# Altium PCB TOF.PcbDoc
Units mil, origin at the board's own origin, x right, y up, seen from the top; angles counter-clockwise.
Board outline 2202.74 x 1415.43 mil, 2 copper layers (Top Layer, Bottom Layer); 40 components, 38 nets, 164 pads, 49 vias.
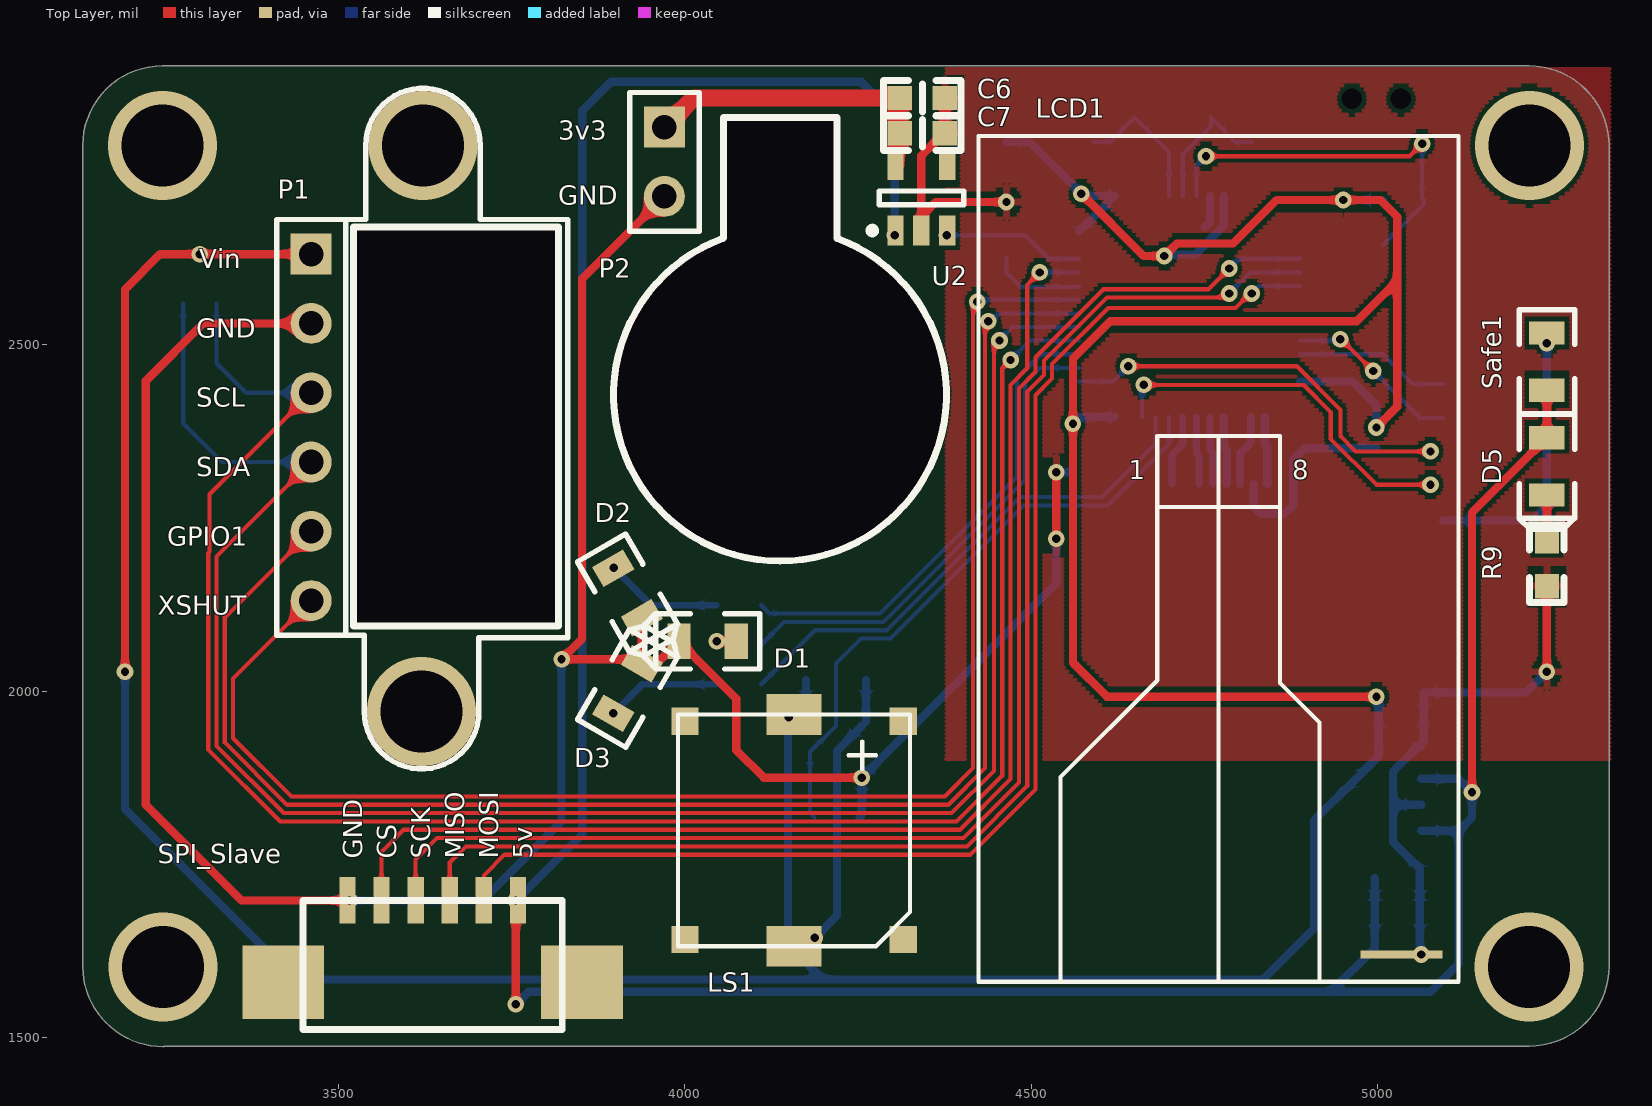
[diagram p0: Top Layer view]
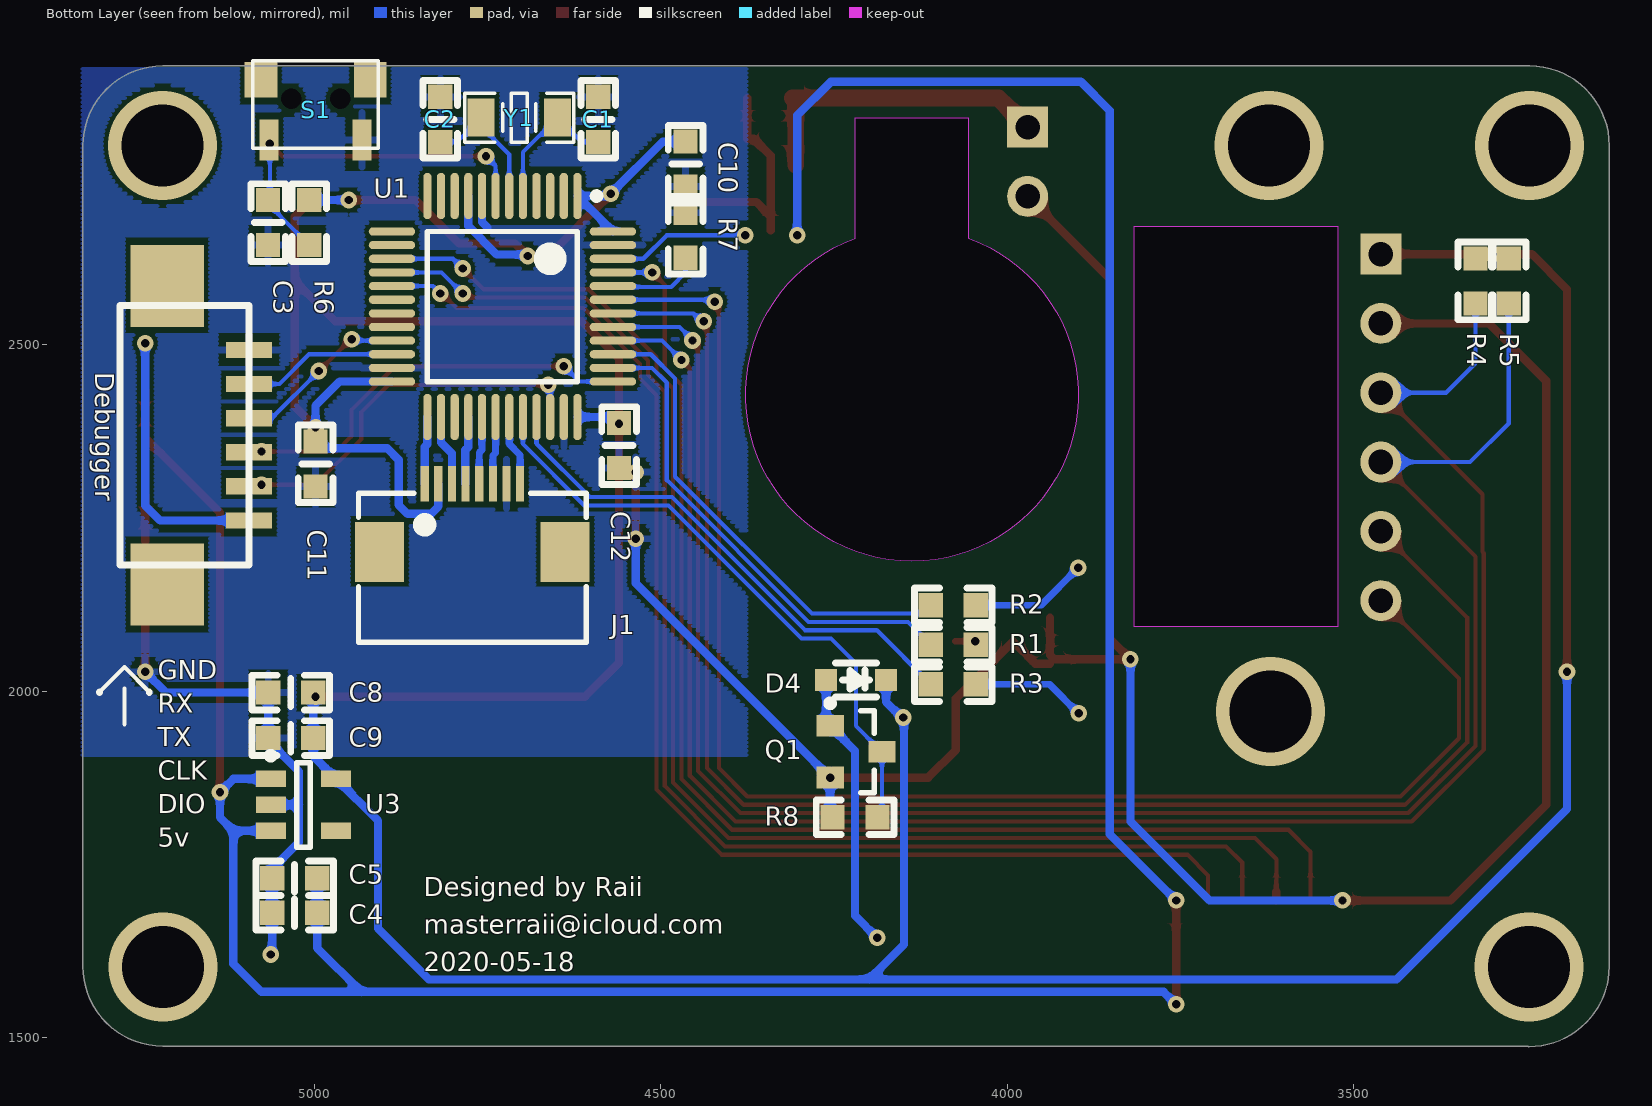
[diagram p1: Bottom Layer view, seen from below]
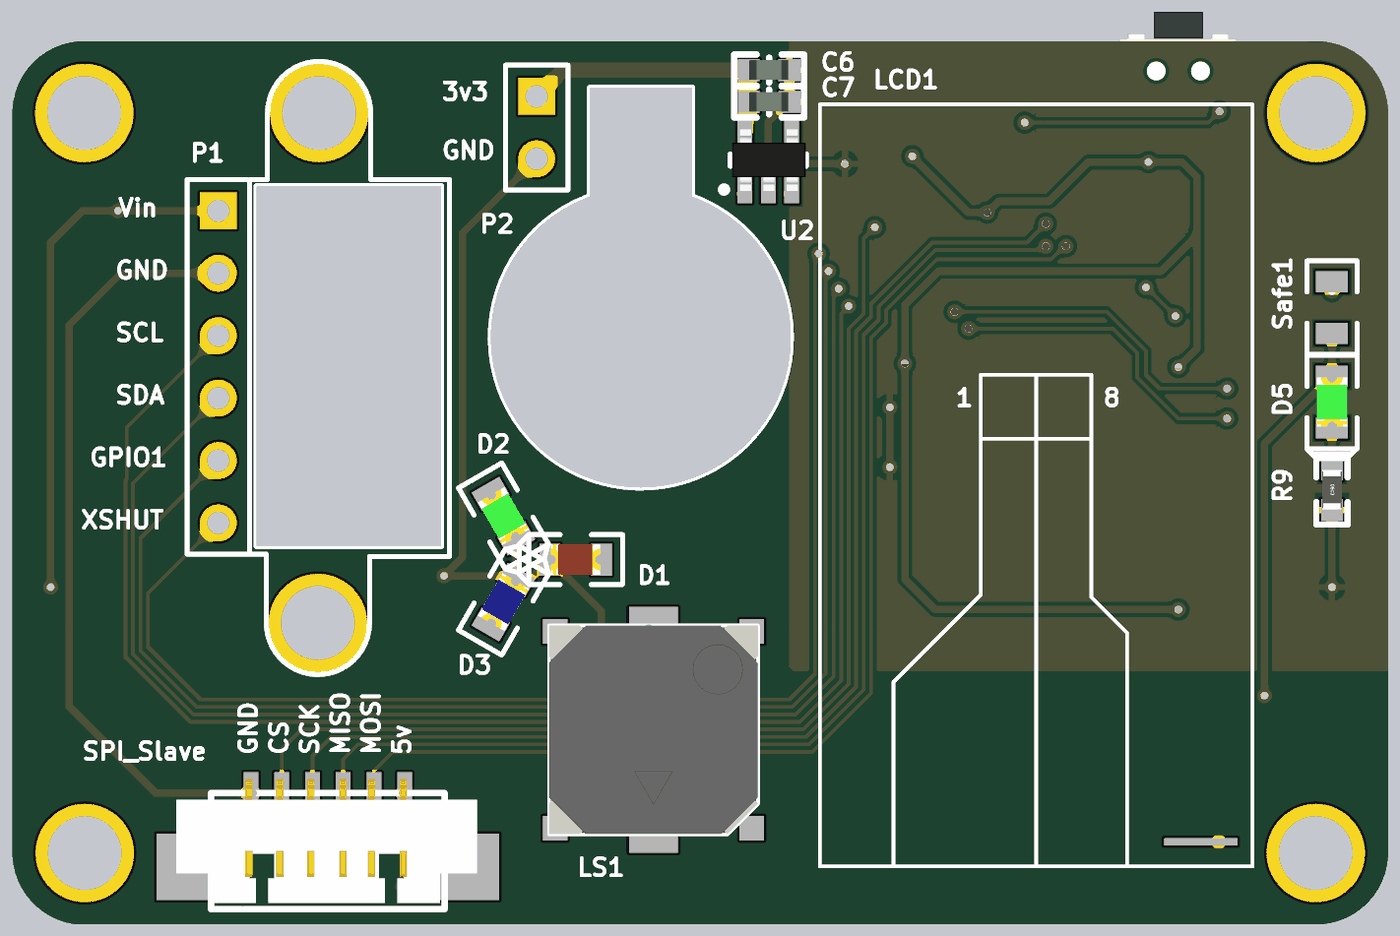
[diagram p2: 3D render of the assembled board from above, using the file's embedded part models]
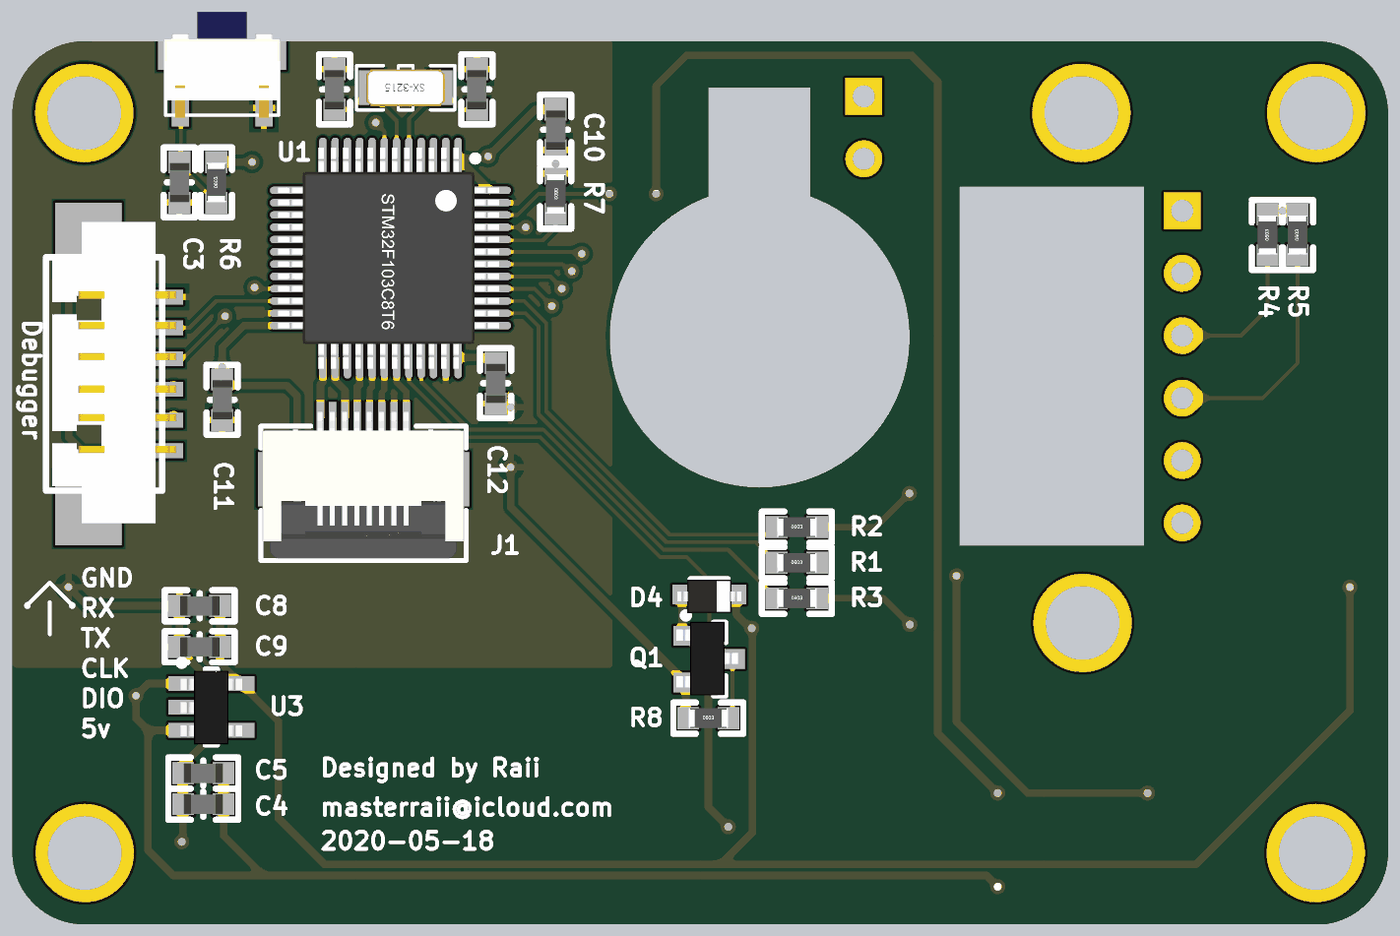
[diagram p3: 3D render of the assembled board from below, using the file's embedded part models]

## Layer stack, top to bottom
Top Solder: solder mask 0.4, Solder Resist, Dk 3.5
Top Layer: signal copper 1.4
Dielectric 1: dielectric 12.6, FR-4, Dk 4.8
Bottom Layer: signal copper 1.4
Bottom Solder: solder mask 0.4, Solder Resist, Dk 3.5

## Board outline
3130.99,1602.71 3130.99,2787.4 cw(c3246,2787.4) 3245.95,2902.42 cw(c3246,2897.4) 3246,2902.42 5218.71,2902.42 cw(c5218.71,2787.4) 5333.72,2787.4 5333.72,1602.71 cw(c5218.71,1602.71) 5218.71,1487.69 3249.28,1487.69 cw(c3246.71,1492) 3246.71,1486.98 cw(c3246.71,1602) 3165.03,1521.03 cw(c3246,1602.71)
cut-out: 4055.11,2653.47 ccw(c4137.24,2427.8) 4219.38,2653.47 4219.38,2827.8 4055.95,2827.8 4055.95,2654.32
cut-out: 3522,2094 3522,2670 3817.41,2670 3817.41,2094

## Design rules (kind name [scope] priority, off if disabled: settings)
Clearance [All] p1: gap=6 ignorepadtopadclearanceinfootprint=TRUE
PolygonConnect [All] p1: connectstyle=Relief reliefconductorwidth=10 reliefentries=4 polygonreliefangle="90 Angle" airgapwidth=10
RoutingVias [All] p1: holewidth=80 width=80 viastyle="Through Hole" minholewidth=12 minwidth=24 maxholewidth=12 maxwidth=24
SolderMaskExpansion [All] p1: expansion=4
Width [All] p1: maxlimit=60 minlimit=6 preferedwidth=6
30 further rules are at their usual default settings.

## Components (designator, comment, footprint, x,y, rotation, side; value= is the part's Value field where it differs from the comment)
C1 "Cap" 0603C 4590,2825.23 r270 bottom value=20pF
C2 "Cap" 0603C 4818,2825.23 r270 bottom value=20pF
C3 "Cap" 0603C 5066.5,2676.26 r90 bottom value=100nF
C4 "Cap" 0603C 5028.17,1680.28 r180 bottom value=100nF
C5 "Cap" 0603C 5028.17,1730 r180 bottom value=100nF
C6 "Cap" 0603C 4342.67,2856.08 r180 top value=100nF
C7 "Cap" 0603C 4342.67,2805.17 r180 top value=100nF
C8 "Cap" 0603C 5033.83,1998 r180 bottom value=100nF
C9 "Cap" 0603C 5033.83,1932.28 r180 bottom value=100nF
C10 "Cap" 0603C 4464,2760.65 r90 bottom value=100nF
C11 "Cap" 0603C 4998,2328 r90 bottom value=100nF
C12 "Cap" 0603C 4560,2354.5 r90 bottom value=100nF
D1 "LED0" LED-0805-Red 4032.83,2072 r180 top
D2 "LED0" 0805LED 3917.32,2141.8 r300 top
D3 "LED0" LED-0805-Blue 3917.32,2004 r60 top
D4 "Diode" SOD-323- 4218,2016 r0 bottom
D5 "LED0" 0805LED 5244,2324.43 r270 top
Debugger "Header 6" GX1.25_T_6P 5094,2369.39 r90 bottom
J1 "FPC0.5-8P" FPC0.5-8P 4771.65,2200.79 r180 bottom
LCD1 "1.14 ''135x240 LCD" "1.14'' LCD" 4423.76,1580.63 r0 top
LS1 "Speaker" MLT-8530 4157.48,1799.21 r90 top
P1 "Header 6" HDR1X6 3460.63,2630.71 r270 top
P2 "Header 2" HDR1X2 3970.41,2814 r270 top
Q1 "AO3400" SOT-23 4218,1912.6 r180 bottom
R1 "10K" 0603R 4077.67,2067 r180 bottom
R2 "10K" 0603R 4077.67,2124 r180 bottom
R3 "10K" 0603R 4077.67,2010 r180 bottom
R4 "10K" 0603R 3324,2592 r90 bottom
R5 "10K" 0603R 3276,2592 r90 bottom
R6 "10K" 0603R 5007.26,2676.26 r90 bottom
R7 "Res2" 0603R 4464,2658 r270 bottom value=10K
R8 "Res2" 0603R 4219.38,1818 r180 bottom value=1K
R9 "10K" 0603R 5244,2184 r270 top
S1 "SW-PB" Key-2*4*3.5-S 4998,2898 r180 bottom
Safe1 "Res2" 0805R 5244,2475.7 r90 top value=1A
SPI_Slave "Header 6" GX1.25_T_6P 3636,1698 r180 top
U1 "STM32F100C8T6B" LQFP-48 4728.35,2555.12 r270 bottom
U2 "RT9013-3.3" SOT-23-5 4341.31,2712 r90 top
U3 "RT9013-3.3" SOT-23-5 5015.43,1836 r180 bottom
Y1 "8Mhz" Cry-3215 4704,2827.8 r0 bottom

## Footprints (in the part's own frame and the unit in brackets; to place one, negate y for a bottom-side part, rotate by r counter-clockwise, add the part's x,y. Pads: shape width x height; smd on the part's side, far side on the other; paste and mask are expansions set on the pad)
"1.14'' LCD" [mm]
  rect 3x0.3 smd: 1(15.5,1)
  silkscreen extent 0,0 17.6,31
0603C [mil]
  rect 35x35 smd: 1(-32.5,0) 2(32.5,0)
  silkscreen extent -56,-25 56,25, body extent -31,-16 31,15, height 18
0603R [mil]
  rect 35x35 smd: 1(-32.5,0) 2(32.5,0)
  silkscreen extent -56,-25 56,25, body extent -31,-16 31,16, height 16
0805LED [mm] "Chip Resistor, 2-Leads, Body 2.00x1.25mm, IPC Medium Density"
  rect 0.85x1.3 smd: 1(-1.05,0) 2(1.05,0)
  silkscreen extent -1.91,-1.02 2.3,1.02, body extent -1,-0.62 1,0.63, height 1.1
0805R [mm] "Chip Resistor, 2-Leads, Body 2.00x1.25mm, IPC Medium Density"
  rect 0.85x1.3 smd: 1(-1.05,0) 2(1.05,0)
  silkscreen extent -1.91,-1.02 1.91,1.02, body extent -1,-0.63 1,0.63, height 0.5
Cry-3215 [mm]
  rect 1x1.4 smd: 1(1.4,0) 2(-1.4,0)
  silkscreen extent -2,-0.9 2,0.9, body extent -1.6,-0.75 1.6,0.75, height 0.81
FPC0.5-8P [mm]
  rect 1.8x2.2 smd: 0(-3.4,0) 0(3.4,0)
  rect 0.3x1.3 smd: 1(1.75,2.497) 2(1.25,2.497) 3(0.75,2.497) 4(0.25,2.497) 5(-0.25,2.497) 6(-0.75,2.497) 7(-1.25,2.497) 8(-1.75,2.497)
  silkscreen extent -4.17,-3.3 4.17,2.16, body extent -4.11,-3.23 4.09,2.77, height 2
GX1.25_T_6P [mm]
  rect 3x2.7 smd: 0(-5.475,3) 0(5.475,3)
  rect 0.6x1.7 smd: 1(-3.125,0) 2(-1.875,0) 3(-0.625,0) 4(0.625,0) 5(1.875,0) 6(3.125,0)
  silkscreen extent -4.75,0 4.75,4.72, body extent -6.07,-0.58 6.18,4.47, height 3.71
HDR1X2 [mm] "Connector; Header; 2 Position"
  rect 1.5x1.5 hole 0.9: 1(0,0)
  round 1.5 hole 0.9: 2(2.54,0)
  silkscreen extent -1.27,-1.27 3.81,1.27
HDR1X6 [mm] "Connector; Header; 6 Position"
  rect 1.5x1.5 hole 0.9: 1(0,0)
  round 1.5 hole 0.9: 2(2.54,0) 3(5.08,0) 4(7.62,0) 5(10.16,0) 6(12.7,0)
  silkscreen extent -1.27,-1.27 13.97,1.27
Key-2*4*3.5-S [mm]
  rect 1.2x1.3 smd: 0(-2,-0.4) 0(2,-0.4)
  rect 0x0 hole 0.75: 0(-0.9,-1.1) 0(0.9,-1.1)
  rect 0.7x1.5 smd: 1(-1.7,-2.6) 2(1.7,-2.6)
  silkscreen extent -2.3,-2.9 2.3,0.3, body extent -2.35,-3 2.35,1.3, height 2.8
LED-0805-Blue [mm] "Chip Resistor, 2-Leads, Body 2.00x1.25mm, IPC Medium Density"
  rect 0.85x1.3 smd: 1(-1.05,0) 2(1.05,0)
  silkscreen extent -1.91,-1.02 2.3,1.02, body extent -1,-0.62 1,0.63, height 1.1
LED-0805-Red [mm] "Chip Resistor, 2-Leads, Body 2.00x1.25mm, IPC Medium Density"
  rect 0.85x1.3 smd: 1(-1.05,0) 2(1.05,0)
  silkscreen extent -1.9,-1.02 2.3,1.02, body extent -1,-0.62 1,0.63, height 1.1
LQFP-48 [mm]
  oval 1.7x0.3 smd: 1(-4.05,2.75) 2(-4.05,2.25) 3(-4.05,1.75) 4(-4.05,1.25) 5(-4.05,0.75) 6(-4.05,0.25) 7(-4.05,-0.25) 8(-4.05,-0.75) 9(-4.05,-1.25) 10(-4.05,-1.75) 11(-4.05,-2.25) 12(-4.05,-2.75) 25(4.05,-2.75) 26(4.05,-2.25) 27(4.05,-1.75) 28(4.05,-1.25) 29(4.05,-0.75) 30(4.05,-0.25) 31(4.05,0.25) 32(4.05,0.75) 33(4.05,1.25) 34(4.05,1.75) 35(4.05,2.25) 36(4.05,2.75)
  oval 0.3x1.7 smd: 13(-2.75,-4.05) 14(-2.25,-4.05) 15(-1.75,-4.05) 16(-1.25,-4.05) 17(-0.75,-4.05) 18(-0.25,-4.05) 19(0.25,-4.05) 20(0.75,-4.05) 21(1.25,-4.05) 22(1.75,-4.05) 23(2.25,-4.05) 24(2.75,-4.05) 37(2.75,4.05) 38(2.25,4.05) 39(1.75,4.05) 40(1.25,4.05) 41(0.75,4.05) 42(0.25,4.05) 43(-0.25,4.05) 44(-0.75,4.05) 45(-1.25,4.05) 46(-1.75,4.05) 47(-2.25,4.05) 48(-2.75,4.05)
  silkscreen extent -4.17,-2.75 2.75,3.57, body extent -4.5,-4.58 4.5,4.42, height 1.6
MLT-8530 [mm]
  rect 1x1 smd: 0(-4,-4) 0(-4,4) 0(4,-4) 0(4,4)
  rect 1.5x2 smd: 1(4.25,0) 2(-4.25,0)
  silkscreen extent -4.25,-4.25 4.25,4.25, body extent -4.25,-4.25 4.25,4.25, height 3
SOD-323- [mm] "开关二极管2.60mmx1.20mm"
  rect 0.8x0.8 smd: 1(1.1,0) 2(-1.1,0)
  silkscreen extent -0.75,-0.63 0.75,0.63, body extent -1.3,-0.6 1.3,0.75, height 1.1
SOT-23 [mm] "SOT23, 3-Leads, Body 2.90x2.45mm, Pitch 0.95mm, IPC Medium Density"
  rect 1x0.8 smd: 1(-0.95,0.95) 2(0.95,0) 3(-0.95,-0.95)
  silkscreen extent -1.08,-1.5 0.67,1.9, body extent -1.33,-1.47 1.17,1.53, height 1.05
SOT-23-5 [mm] "SOT23, 5-Leads, Body 2.90x2.80mm, Pitch 0.95mm, IPC Medium Density"
  rect 1.1x0.6 smd: 1(-1.2,0.95) 2(-1.2,0) 3(-1.2,-0.95) 4(1.2,-0.95) 5(1.2,0.95)
  silkscreen extent -1.32,-1.55 0.25,1.92, body extent -1.25,-1.53 1.25,1.47, height 1.05

## Part data
C1 C2 C3 C4 C5 C6 C7 C8 C9 C10 C11 C12: "Capacitor", LatestRevisionDate=17-Jul-2002, LatestRevisionNote="Re-released for DXP Platform.", PackageDescription="Radial Cap, Thru-Hole; 2 Leads; 0.3 in Pin Spacing", PackageReference=RAD-0.3, Published=8-Jun-2000, Publisher="Altium Limited"
D1 D2 D3 D5: "Typical INFRARED GaAs LED", LatestRevisionDate=08-Jul-2005, LatestRevisionNote="Mech Layer 1 removed.", PackageDescription="LED; 2 Leads", PackageReference=LED-0, Published=8-Jun-2000, Publisher="Altium Limited"
D4: "Default Diode", Code_JEDEC=DO-214-AB, LatestRevisionDate=17-Jul-2002, LatestRevisionNote="Re-released for DXP Platform.", PackageDescription="DO-214-AB/SMC; 2 C-Bend Leads; Body 7.9 x 5.9 mm, inc. leads (LxW)", PackageReference=SMC, PackageVersion=Sep-1996, Published=8-Jun-2000, Publisher="Altium Limited"
Debugger P1 SPI_Slave: "Header, 6-Pin", LatestRevisionDate=17-Jul-2002, LatestRevisionNote="Re-released for DXP Platform.", Publisher="Altium Limited"
J1: "贴片"
LS1: "Loudspeaker", LatestRevisionDate=17-Jul-2002, LatestRevisionNote="Re-released for DXP Platform.", PackageReference=PIN2, Published=24-Mar-1999, Publisher="Altium Limited"
P2: "Header, 2-Pin", LatestRevisionDate=17-Jul-2002, LatestRevisionNote="Re-released for DXP Platform.", Publisher="Altium Limited"
Q1: library part MOSFET-N, "N-Channel MOSFET", LatestRevisionDate=17-Jul-2002, LatestRevisionNote="Re-released for DXP Platform.", PackageDescription="TO, Flat Index; 3 In-Line, Axial Leads; Body Dia. 4.6mm; Lead Dia. 0.5 mm (max)", PackageReference=E3, PackageVersion=1995/1996, Published=8-Jun-2000, Publisher="Altium Limited"
R1 R2 R3 R4 R5 R6 R9: library part Res2, "Resistor", LatestRevisionDate=17-Jul-2002, LatestRevisionNote="Re-released for DXP Platform.", PackageDescription="Axial Device, Thru-Hole; 2 Leads; 0.4 in Pin Spacing", PackageReference=AXIAL-0.4, Published=8-Jun-2000, Publisher="Altium Limited"
R7 R8 Safe1: "Resistor", LatestRevisionDate=17-Jul-2002, LatestRevisionNote="Re-released for DXP Platform.", PackageDescription="Axial Device, Thru-Hole; 2 Leads; 0.4 in Pin Spacing", PackageReference=AXIAL-0.4, Published=8-Jun-2000, Publisher="Altium Limited"
S1: "Switch", LatestRevisionDate=17-Jul-2002, LatestRevisionNote="Re-released for DXP Platform.", PackageDescription="Switch; 2 Leads", PackageReference=SPST-2, Published=24-Mar-1999, Publisher="Altium Limited"
U1: "ARM Cortex-M3 32-bit MCU, 64 KB Flash, 8 KB Internal RAM, 37 I/Os, 48-pin LQFP, -40 to 85 degC, Tray", I/Os (High Current)=37, Operating Frequency(F) (Processor speed) (MHz)=24, Supplier Part Number 1=497-10499-ND, Supply Voltage(Vcc) min (V)=2, A/D Converter="1x12-bit (10 Channel)", ComponentLink1Description="Manufacturer URL", ComponentLink1URL=http://www.st.com/web/en/home.html, ComponentLink2Description=Datasheet, ComponentLink2URL=http://www.st.com/st-web-ui/static/active/en/resource/technical/document/datasheet/CD00251732.pdf, ComponentLink3Description="Package Specification", ComponentLink3URL=http://www.st.com/st-web-ui/static/active/en/resource/technical/document/datasheet/DM00058181.pdf, Core="ARM Cortex-M3", D/A Converter="2x12-bit (2 Channel)", DatasheetVersion="Rev. 7", FLASH Size (Prog) (kB)=64, Internal RAM Size (kB)=8, Mounting Technology="Surface Mount", PackageDescription="48-Pin Low Profile Quad Flat Package, 7 x 7 mm Body, 0.5 mm Pitch", PackageReference=LQFP48, PackageVersion="Rev. 6, 06/2013", Packing=Tray, PartNumber=STM32F100C8T6B, Supplier 1=Digi-Key, Supplier 2=Farnell, Supplier 3=Newark, Supplier 4=Mouser, Supplier Part Number 2=1838511, Supplier Part Number 3=76R0988, Supplier Part Number 4=511-STM32F100C8T6B
U2 U3: library part RT9013, "3.3V 500mA"
Y1: library part XTAL, LatestRevisionDate=17-Jul-2002, LatestRevisionNote="Re-released for DXP Platform.", PackageDescription="Crystal, Thru-Hole; 2 Leads; Body 3.1 x 8.2 mm (Dia.xH)", PackageReference=R38, Published=8-Jun-2000, Publisher="Altium Limited"

## Via types
v1: diameter 24, hole 12, Top Layer to Bottom Layer, tented both sides, 43 vias
v2: diameter 157.48, hole 118.11, Top Layer to Bottom Layer, 6 vias

## Nets (pads, with @x,y where several pads share a name; then routed paths per layer and width w, separated by ;. In a path a pad name is that pad's centre, name@x,y a point inside that pad or via, vN(x,y) a via of type N, cw(c..) or ccw(c..) an arc to the next point about the centre after c; other vN are vias at no path point)
3v3: C8.2 C9.2 C10.2 C11.2 C12.2 D4.2 J1.7 LS1.1 P1.1 R4.2 R5.2 R6.2 U1.1 U1.9 U1.24 U1.36 U1.48 U3.5 | length 6970.9
  Top Layer w12: v1(3192,2028) 3192,2580 3242.71,2630.71 v1(3300,2630.71) P1.1 ; v1(4572,2718) 4662,2628 v1(4692,2628) 4710,2646 4791.29,2646 4854.05,2708.76 v1(4950,2708.76) 5004,2708.76 5028,2684.76 5028,2592 ; v1(4998,1992) 4609.03,1992 4560,2041.03 v1(4560,2386.09) 4560,2480 4614,2534 4970,2534 5028,2592 ; v1(4998,2380.49) 5028,2410.49 5028,2592
  Bottom Layer w12: v1(3192,2028) 3192,1830 3438,1584 4199.27,1584 ; v1(4149.86,1962) 4148.91,1961.05 v1@4148.91,1958.91 ; D4.2 4174.69,1984.69 v1@4148.91,1958.91 ; C10.2 4496.85,2793.15 v1(4572,2718) 4575.43,2714.57 U1.1 U1.48 ; C12.2@4560,2395.67 U1.36 ; v1(4692,2628) 4692,2630.32 4736.59,2630.32 4777.56,2671.28 U1.9 ; J1.7 4820.87,2266.81 4831.68,2256 4865.01,2256 4878,2268.99 4878,2334 4894.49,2350.49 C11.2@4998,2350.49 ; U1.24 4963.15,2446.85 4998,2412 v1(4998,2380.49) ; v1(4950,2708.76) 4950,2706 4952.76,2708.76 R6.2 ; C8.2@5001.33,1992 C9.2 5001.33,1906.55 U3.5 4908,1813.21 4908,1657.46 4834.54,1584 4199.27,1584 ; v1@4148.91,1958.91 4148.91,1634.36 4199.27,1584
5v: C4.2 C5.2 D5.1 Safe1.1 SPI_Slave.1 U2.1 U3.1 U3.3 | length 4583.4
  Top Layer w12: v1(3756,1548) 3756,1694.97 SPI_Slave.1 ; v1(5136,1854) 5136,2257.76 D5.1 Safe1.1
  Bottom Layer w12: v1(3756,1548) 3774,1566 4932,1566 ; v1(3756,1698) 3852,1794 3852,2838 3893.53,2879.53 4254.47,2879.53 4302.97,2831.03 v1(4302.97,2658) ; C5.2 C4.2 4995.67,1629.67 4932,1566 ; U3.3 5116.6,1798.6 ; U3.1 5116.6,1873.4 v1(5136,1854) 5136,1818 5116.6,1798.6 ; 4932,1566 5076,1566 5116.6,1606.6 5116.6,1798.6
GND: C1.1 C2.1 C3.1 C4.1 C5.1 C6.1 C7.1 C8.1 C9.1 C10.1 C11.1 C12.1 D1.2 D2.2 D3.2 Debugger.6 J1.2 LCD1.1 P1.2 P2.2 Q1.3 R7.1 R8.1 R9.2 S1.2 SPI_Slave.6 U1.8 U1.23 U1.35 U1.47 U2.2 U3.2 | length 4978.7
  Top Layer w12: P1.2 3304.71,2530.71 3222,2448 3222,1836 3360,1698 SPI_Slave.6 ; D3.2 3959.29,2039.8 D1.2 4074,1989.49 4074,1915.03 4113.83,1875.2 v1(4255.4,1875.2) ; D2.2 3937.99,2052.2 3931.79,2046 v1(3822,2046) 3851.55,2075.55 3851.55,2595.14 P2.2 ; U2.2 U2.2@4341.31,2685.31 ; C6.1 C7.1 4375.17,2797.17 4365.47,2797.17 4341.31,2773.01 U2.2@4341.31,2685.31 ; v1(4464,2706) 4362,2706 U2.2@4341.31,2685.31 ; v1(4536,2220) v1(4536,2316) ; v1(5244,2028) R9.2
  Bottom Layer w12: v1(3516,1698) 3708,1698 3822,1812 v1(3822,2046) ; R8.1 4255.4,1821.52 v1(4255.4,1875.2) 4536,2155.8 v1(4536,2220) ; v1(4536,2316) 4554,2316 C12.1 ; 4749.92,2669.1 4757.87,2677.05 U1.8 ; v1(5062.68,1620) 5060.67,1622.01 C4.1 C5.1 5060.67,1743.33 5022,1782 5022,1836 ; U3.2 5022,1836 ; v1(5244,2028) 5214,1998 C8.1 C9.1 5066.33,1928.33 5022,1884 5022,1836
GPIO1: P1.5 U1.42 | length 2292.9
  Top Layer w6: P1.5 3336,2106.08 3336,1926 3426,1836 4380,1836 4433,1889 4433,2525 v1@4446,2538
  Bottom Layer w6: v1@4446,2538 4453.28,2545.28 U1.42
  other v1: 4438,2534
Laser_3v3: C6.2 C7.2 P2.1 U2.5 | length 456.1
  Top Layer w24: P2.1 4012.49,2856.08 C6.2 4305.27,2851.18 U2.5@4305.27,2759.24
LCD_BK: J1.1 U1.31 | length 103.1
  Bottom Layer w10: J1.1 4702.76,2340.67 4718.5,2356.42 U1.31
LCD_RS: J1.4 U1.29 | length 98.2
  Bottom Layer w10: U1.29 4757.87,2348.04 4761.81,2344.1 J1.4
LCD_RST: J1.3 U1.30 | length 98.2
  Bottom Layer w10: U1.30 4738.19,2343.94 4742.13,2340 J1.3
LED_B: R3.1 U1.33 | length 751.3
  Bottom Layer w6: R3.1 4188.17,2088 4291.54,2088 4483.54,2280 4602,2280 4679.13,2357.13 U1.33
LED_G: R2.1 U1.39 | length 701.7
  Bottom Layer w6: R2.1 4122.17,2112 4281.6,2112 4479.08,2309.48 4479.08,2451.08 4514.22,2486.22 U1.39
LED_R: R1.1 U1.38 | length 706.6
  Bottom Layer w6: R1.1 4143.17,2100 4286.57,2100 4491.08,2304.51 4491.08,2445.08 4512.54,2466.54 U1.38
NetC1_2: C1.2 U1.5 Y1.2 | length 207.3
  Bottom Layer w6: C1.2 4613.82,2792.73 Y1.2 4698.82,2777.86 U1.5
NetC2_2: C2.2 U1.6 Y1.1 | length 203.5
  Bottom Layer w6: U1.6 4718.5,2774.5 4759.12,2815.12 Y1.1 4794.18,2792.73 C2.2
NetC3_2: C3.2 R6.1 S1.1 U1.7 | length 554.4
  Top Layer w6: v1(4752,2772) 5046,2772 v1(5064,2790)
  Bottom Layer w6: U1.7 4738.19,2758.19 v1(4752,2772) ; R6.1 5066.5,2703.01 C3.2 5064,2711.26 v1(5064,2790)
NetD1_1: D1.1 R1.2 | length 28.3
  Top Layer w10: v1(4045.83,2072) D1.1
NetD2_1: D2.1 R2.2 | length 170.2
  Bottom Layer w10: v1(3897.36,2178) 3951.36,2124 R2.2
NetD3_1: D3.1 R3.2 | length 165.9
  Bottom Layer w10: v1(3896.63,1968) 3938.63,2010 R3.2
NetD4_1: D4.1 LS1.2 Q1.1 | length 402.6
  Bottom Layer w6: Q1.1 Q1.1@4261.31,1955.91
  Bottom Layer w12: v1(4187.47,1644) 4219.38,1675.91 4219.38,1913.98 Q1.1 ; Q1.1@4261.31,1955.91 D4.1
NetD5_2: D5.2 R9.1 | length 66.6
  Top Layer w12: R9.1 D5.2
NetDebugger_1: Debugger.1 Safe1.2 | length 393
  Bottom Layer w12: Debugger.1 5222.36,2246.36 5244,2268 v1(5244,2502)
NetR7_2: R7.2 U1.44 | length 135.5
  Bottom Layer w6: R7.2 4464,2604 4484.67,2583.33 4567.58,2583.33 U1.44
PA12: Q1.2 R8.2 U1.32 | length 891.2
  Bottom Layer w6: R8.2 4180.6,1824.28 Q1.2 4218,1950 4218,2040 4254,2076 4296.51,2076 4488.51,2268 4610.29,2268 4698.82,2356.53 U1.32
PB9: U1.46 U2.3 | length 205.1
  Bottom Layer w6: v1(4377.86,2658) 4491.08,2658 4525.06,2624.02 U1.46
SCL: P1.3 R4.1 U1.40 | length 2748.6
  Top Layer w6: P1.3 3314.06,2284.14 3314.06,2201.11 3312,2199.05 3312,1916.06 3416.06,1812 4392,1812 4458,1878 4458,2466 v1(4470,2478)
  Bottom Layer w6: R4.1 3324,2473.21 3366.5,2430.71 P1.3 ; v1(4470,2478) 4497.91,2505.91 U1.40
SDA: P1.4 R5.1 U1.41 | length 2782.4
  Top Layer w6: P1.4 3324,2194.08 3324,1921.03 3421.03,1824 4384.97,1824 4446,1885.03 4446,2499 v1@4455,2508
  Bottom Layer w6: R5.1 3276,2386.49 3331.78,2330.71 P1.4 ; v1@4455,2508 4472.59,2525.59 U1.41
  other v1: 4454,2506
SPI1_CS: SPI_Slave.5 U1.45 | length 1827.5
  Top Layer w6: SPI_Slave.5 3562.18,1768.18 3594,1800 4396.97,1800 4470,1873.03 4470,2442 4494,2466 4494,2586.33 v1(4512,2604.33)
  Bottom Layer w6: v1(4512,2604.33) 4512,2604 4512.33,2604.33 U1.45
SPI1_MISO: SPI_Slave.3 U1.16 | length 1980.1
  Top Layer w6: SPI_Slave.3 3660.61,1752.61 3684,1776 4406.91,1776 4494,1863.09 4494,2432.06 4518,2456.06 4518,2476.97 4609.03,2568 4779.7,2568 v1(4785.7,2574)
  Bottom Layer w6: v1(4785.7,2574) 4816.03,2604.33 U1.16
SPI1_MOSI: SPI_Slave.2 U1.17 | length 1911.7
  Top Layer w6: SPI_Slave.2 3709.82,1734 3739.82,1764 4411.88,1764 4506,1858.12 4506,2427.09 4530,2451.09 4530,2472 4611,2553 4794.4,2553 4814.93,2573.53 v1@4818,2573.53
  Bottom Layer w6: v1(4818,2574) 4828.65,2584.65 U1.17
SPI1_SCK: SPI_Slave.4 U1.15 | length 2040.3
  Top Layer w6: SPI_Slave.4@3611.39,1710.61 3611.39,1757.39 3642,1788 4401.94,1788 4482,1868.06 4482,2437.03 4506,2461.03 4506,2481.94 4604.06,2580 4755.7,2580 v1(4785.7,2610)
  Top Layer w12: SPI_Slave.4 SPI_Slave.4@3611.39,1710.61
  Bottom Layer w6: v1(4785.7,2610) 4799.72,2624.02 U1.15
SPI2_CS: J1.8 U1.25 | length 98.2
  Bottom Layer w12: U1.25 4836.61,2356.42 4840.55,2352.48 J1.8
SPI2_MISO: U1.27
SPI2_MOSI: J1.5 U1.28 | length 98.6
  Bottom Layer w12: U1.28 4777.56,2352.48 4782,2348.04 4782,2299.6 J1.5
SPI2_SCK: J1.6 U1.26 | length 103.1
  Bottom Layer w12: J1.6 4801.18,2343.22 4816.93,2358.97 U1.26
SWCLK: Debugger.3 U1.37 | length 589.5
  Top Layer w6: v1(4639.76,2468.92) 4883.13,2468.92 4946,2406.06 4946,2368 4968,2346 v1(5076,2346)
  Bottom Layer w6: U1.37 4617.69,2446.85 v1(4639.76,2468.92)
SWDIO: Debugger.2 U1.34 | length 543.9
  Top Layer w6: v1(4662,2442) 4893.09,2442 4932,2403.09 4932,2364 4998,2298 v1(5076,2298)
  Bottom Layer w6: U1.34 4659.45,2439.45 v1(4662,2442)
U3RX: Debugger.5 U1.22 | length 224
  Bottom Layer w6: U1.22 5007.26,2486.22 5050.26,2443.21 Debugger.5
U3TX: Debugger.4 U1.21 | length 258.3
  Top Layer w6: v1(4946,2508) 4944,2506 4949.26,2506 v1(4993.21,2462.04)
  Bottom Layer w6: U1.21 4943.91,2505.91 v1(4946,2508) ; v1(4993.21,2462.04) 5061.26,2394 Debugger.4
XSHUT: P1.6 U1.43 | length 2188.8
  Top Layer w6: P1.6 3348,2018.08 3348,1932 3432,1848 4375.03,1848 4416,1888.97 4416,2556 v1(4422,2562)
  Bottom Layer w6: v1(4422,2562) 4424.96,2564.96 U1.43
pads on no net: Debugger.0 J1.0 LS1.0 S1.0 SPI_Slave.0 U1.2 U1.3 U1.4 U1.10 U1.11 U1.12 U1.13 U1.14 U1.18 U1.19 U1.20 U2.4 U3.4
copper on no net:
  other v2: 3246.71,1602 5218,1602 3620.08,1970.47 3246,2787.4 3622.05,2787.4 5218.71,2787.4

## Polygon pours and split planes (outlines as drawn)
GND on Top Layer "Top Layer-GND" (hatched Horizontal grid 6 track 6, pour order 2): 4377.86,2904 4377.86,1902.73 4377.13,1902 4383.13,1896 5334,1896 5334,2898
GND on Bottom Layer "Bottom Layer-GND" (hatched Horizontal grid 6 track 6, pour order 0): 4380,2904 4376.4,2900.4 4376.4,1902 5328,1902 5334,1908 5334,2898

## Silkscreen, mask and mechanical layers (free items; w line width, h text height)
Top Overlay:
  lines w7.87: 3510.63,2080.71 3537.4,2080.71 3537.4,1970.47 ccw(c3620.08,1970.47) 3702.76,1970.47 3702.76,2076.77 ; 3510.63,2680.71 3538.98,2680.71 3539.37,2681.1 3539.37,2787.4 cw(c3622.05,2787.4) 3704.72,2787.4 3704.72,2681.1 3705.12,2680.71 3830.71,2680.71 3830.71,2077.17 3703.15,2077.17
  lines w10: 3522,2094 3522,2670 3817.41,2670 3817.41,2094 3522,2094 ; 4055.11,2653.47 ccw(c4137.24,2427.8) 4219.38,2653.47 4219.38,2827.8 4055.95,2827.8 4055.95,2654.32 4055.11,2653.47
  text "3v3" at 3817.41,2796 h27.56
  text "GND" at 3817.41,2702.16 h27.56
  text "Vin" at 3299.14,2610.13 h27.56
  text "GND" at 3294.55,2510.13 h27.56
  text "SCL" at 3294.55,2410.13 h27.56
  text "SDA" at 3294.55,2310.13 h27.56
  text "GPIO1" at 3253.22,2210.13 h27.56
  text "XSHUT" at 3239.45,2110.13 h27.56
  text "GND" at 3534,1758 h27.56 r90
  text "CS" at 3583.2,1758 h27.56 r90
  text "SCK" at 3632.4,1758 h27.56 r90
  text "MISO" at 3681.6,1758 h27.56 r90
  text "MOSI" at 3730.8,1758 h27.56 r90
  text "5v" at 3780,1758 h27.56 r90
Bottom Overlay:
  lines w6: 5238,1999.02 5274,2035.02 5310,1999.02 ; 5274,1952.28 5274,2004
  lines w10: 5238,1998 5238,1999.02 ; 5310,1998 5310,1999.02
  text "GND" at 5226,2017.02 h27.56
  text "RX" at 5226,1968.77 h27.56
  text "TX" at 5226,1920.51 h27.56
  text "CLK" at 5226,1872.25 h27.56
  text "DIO" at 5226,1823.99 h27.56
  text "5v" at 5226,1775.73 h27.56
  text "Designed by Raii" at 4842,1704 h27.56
  text "masterraii@icloud.com" at 4842,1650 h27.56
  text "2020-05-18" at 4842,1596 h27.56
Drill Drawing:
  lines w10: 3136.71,1602 ccw(c3246.71,1602) 3246.71,1492 ; 3136,1602.71 ccw(c3246,1602.71) 3246,1492.71 5218.71,1492.71 ccw(c5218.71,1602.71) 5328.71,1602.71 5328.71,2787.4 ccw(c5218.71,2787.4) 5218.71,2897.4 3246,2897.4 ccw(c3246,2787.4) 3136,2787.4 3136,1602.71

## Text inside footprints (layer, text, board x,y; h text height)
LCD1: Top Overlay "8" at 4876.52,2305.92 h27.56; Top Overlay "1" at 4640.3,2305.92 h27.56